# Altium PCB Chocolate_Vending_Machine_V2.1.PcbDoc
Units mm, origin at the board's own origin, x right, y up, seen from the top; angles counter-clockwise.
Board outline 80 x 72 mm, 2 copper layers (Top Layer, Bottom Layer); 26 components, 25 nets, 135 pads, 23 vias.
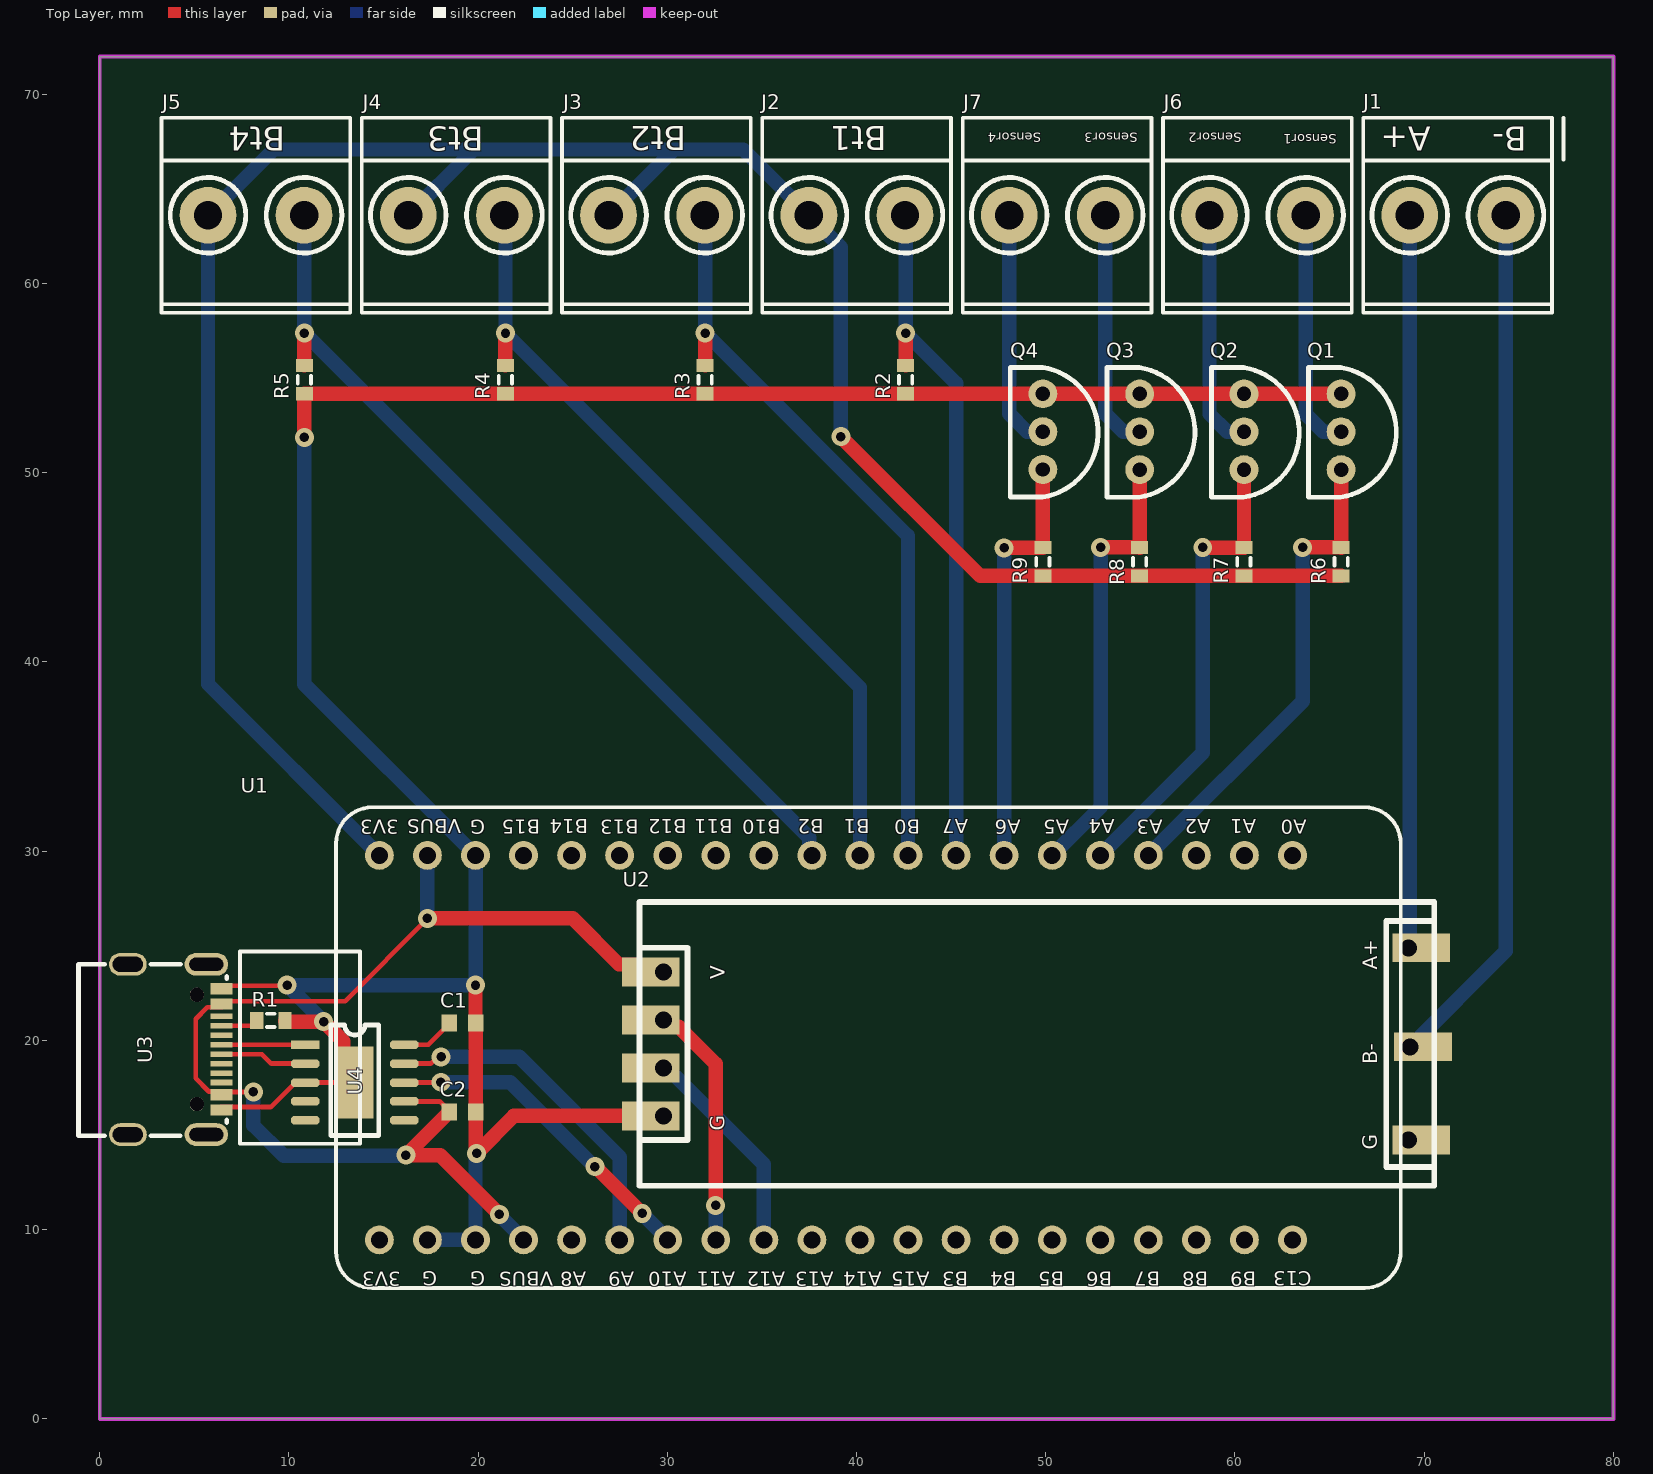
[diagram p0: Top Layer view]
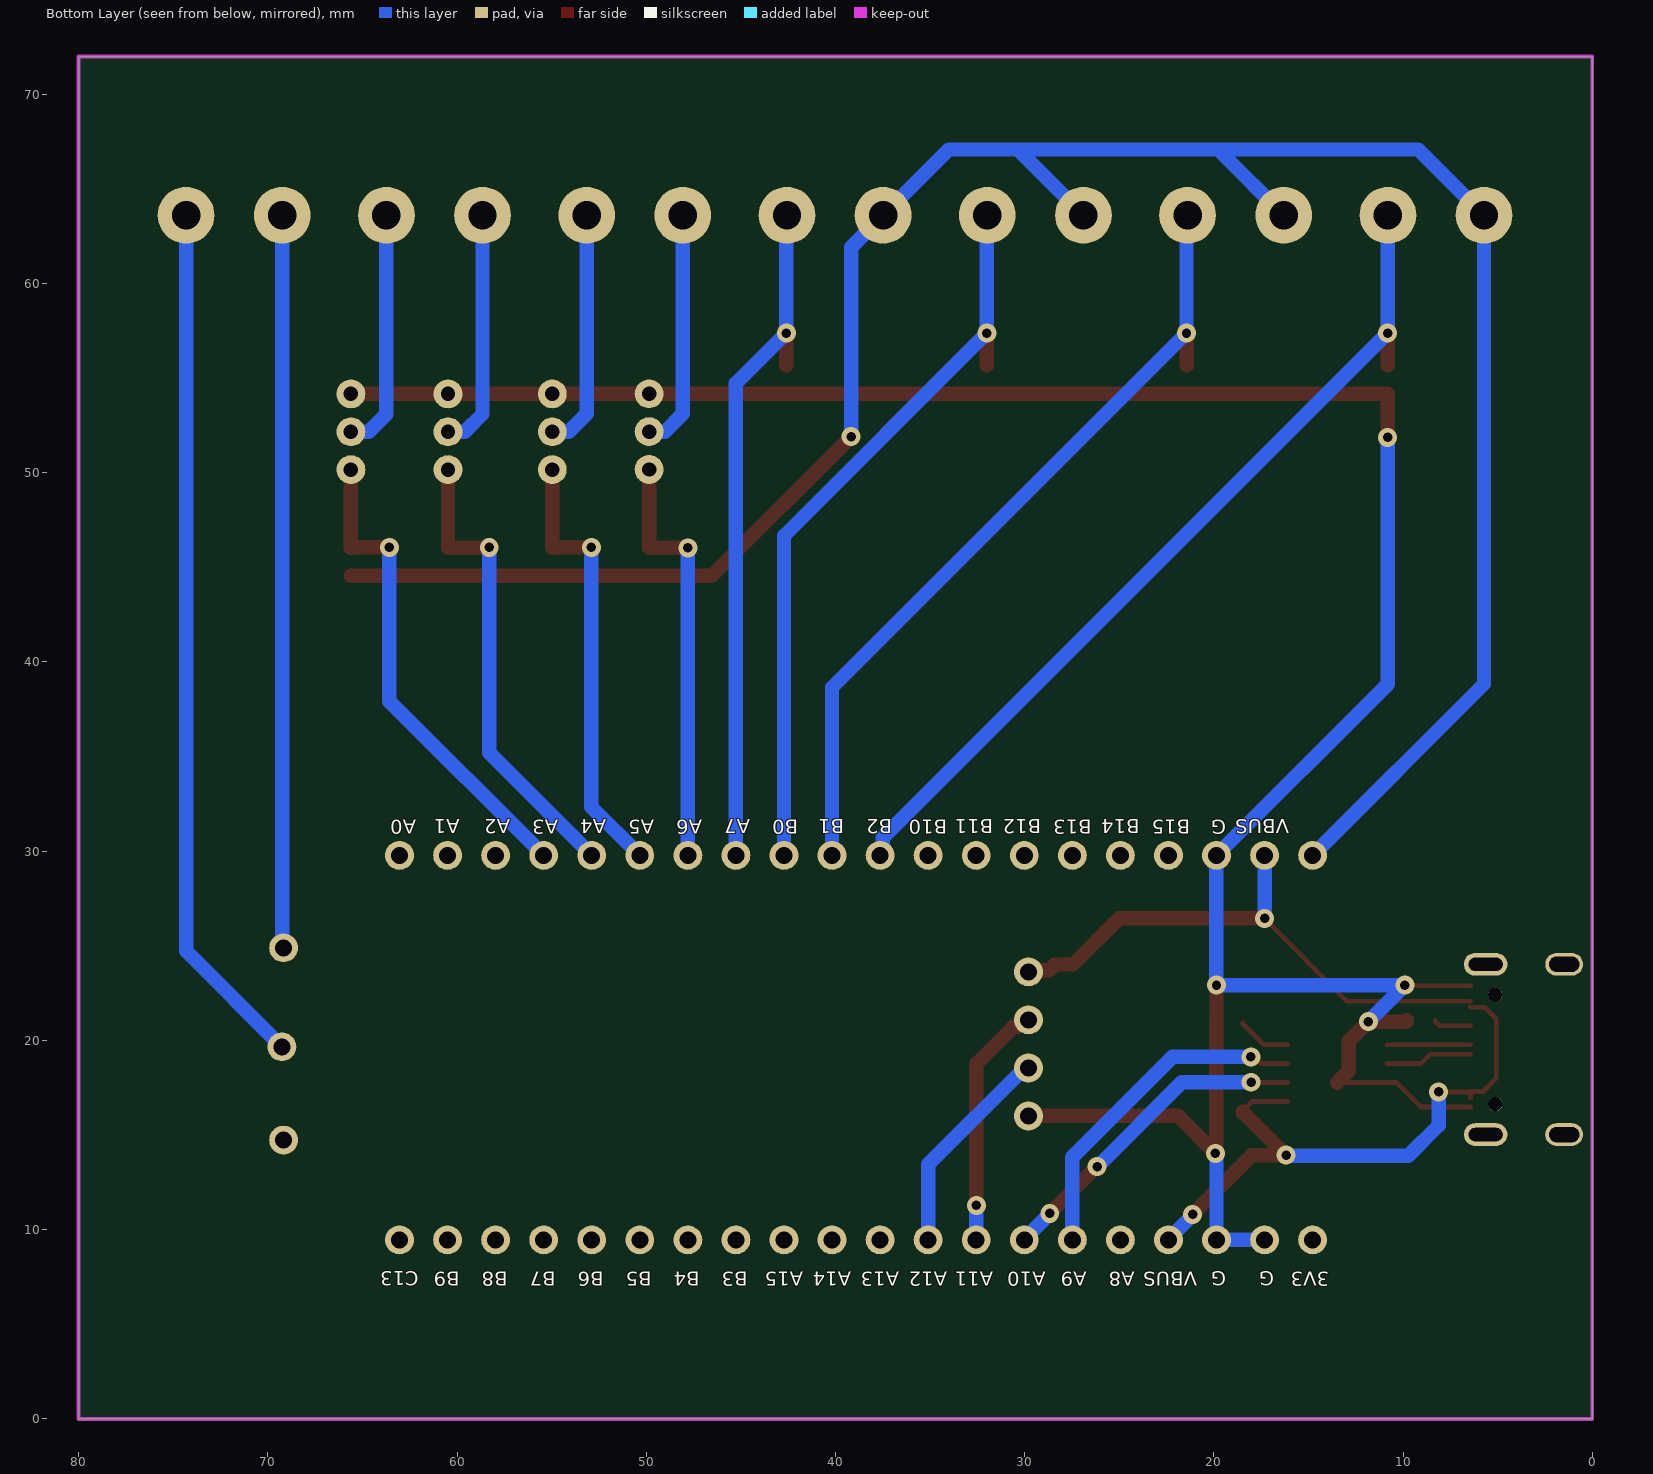
[diagram p1: Bottom Layer view, seen from below]

## Layer stack, top to bottom
Top Solder: solder mask 0.0102, Solder Resist, Dk 3.5
Top Layer: signal copper 0.0356
Dielectric 1: dielectric 0.32, FR-4, Dk 4.8
Bottom Layer: signal copper 0.0356
Bottom Solder: solder mask 0.0102, Solder Resist, Dk 3.5

## Board outline
0,-0.016 0,71.984 80,71.984 80,-0.016

## Design rules (kind name [scope] priority, off if disabled: settings)
Clearance [All] p1: gap=0.102 ignorepadtopadclearanceinfootprint=FALSE except(0: Arc-Hole Track-Hole SMDPad-Hole THPad-Hole Via-Hole Fill-Hole Poly-Hole Region-Hole Text-Hole)
ComponentClearance [All] p1 off: gap=0.254 collisioncheckmode=3 verticalgap=0.254 showdistances=FALSE
PolygonConnect [All] p1: connectstyle=Relief reliefconductorwidth=0.254 reliefentries=4 polygonreliefangle="90 Angle" airgapwidth=0.254
RoutingVias [All] p1: holewidth=0.5 width=1 viastyle="Through Hole" minholewidth=0.5 minwidth=1 maxholewidth=0.5 maxwidth=1
SolderMaskExpansion [All] p1: expansion=0.102 istentingtop=FALSE
Width [All] p1: maxlimit=0.762 minlimit=0.178 preferedwidth=0.254 minimp=50.000000 maximp=50.000000 favimp=50.000000
29 further rules are at their usual default settings.

## Classes and differential pairs
component class Chocolate_Vending_Machine: C1 C2 J1 J2 J3 J4 J5 J6 J7 Q1 Q2 Q3 Q4 R1 R4 R6 R7 R8 R9 U1 U2 U3 U4

## Components (designator, comment, footprint, x,y, rotation, side; value= is the part's Value field where it differs from the comment)
C1 "Cap Semi" 1608[0603] 19.175,20.911 r0 top value=0.1uF
C2 "Cap Semi" 1608[0603] 19.175,16.212 r180 top value=0.1uF
J1 "Terminal_Block" "terminal block" 74.32,63.602 r90 top
J2 "Terminal_Block" "terminal block" 42.563,63.602 r90 top
J3 "Terminal_Block" "terminal block" 31.977,63.602 r90 top
J4 "Terminal_Block" "terminal block" 21.391,63.602 r90 top
J5 "Terminal_Block" "terminal block" 10.805,63.602 r90 top
J6 "Terminal_Block" "terminal block" 63.734,63.602 r90 top
J7 "Terminal_Block" "terminal block" 53.149,63.602 r90 top
Q1 "S9013" S9013 65.606,52.155 r180 top
Q2 "S9013" S9013 60.475,52.155 r180 top
Q3 "S9013" S9013 54.964,52.155 r180 top
Q4 "S9013" S9013 49.848,52.162 r180 top
R1 "Res3" J1-0603 9.05,21.05 r180 top value=5.1K
R2 "Res3" J1-0603 42.596,54.915 r270 top value=1K
R3 "Res3" J1-0603 32.004,54.915 r270 top value=1K
R4 "Res3" J1-0603 21.438,54.915 r270 top value=1K
R5 "Res3" J1-0603 10.82,54.915 r270 top value=1K
R6 "Res3" J1-0603 65.608,45.288 r90 top value=1K
R7 "Res3" J1-0603 60.477,45.288 r90 top value=1K
R8 "Res3" J1-0603 54.966,45.288 r90 top value=1K
R9 "Res3" J1-0603 49.85,45.288 r90 top value=1K
U1 "STM32F411_TYPEC" STM32F411_TypeC 66.853,32.309 r180 top
U2 "UART_TO_485" UART_TO_RS485 70.367,12.294 r90 top
U3 "Type_C" Type_C_V2 2.996,19.336 r270 top
U4 "CH340K" CH340K_V1 13.486,17.764 r0 top

## Footprints (in the part's own frame and the unit in brackets; to place one, negate y for a bottom-side part, rotate by r counter-clockwise, add the part's x,y. Pads: shape width x height; smd on the part's side, far side on the other; paste and mask are expansions set on the pad)
1608[0603] [mm] "Chip Capacitor, Body 1.6x0.8mm, IPC High Density"
  rect 0.8x0.9 smd: 1(-0.7,0) 2(0.7,0)
  body extent -0.87,-0.48 0.87,0.48, height 1.3
CH340K_V1 [mm] "自己畫的"
  rect 2x3.8 smd: 0(0,0)
  rect 1.5x0.45 smd: 1(-2.616,2)
  oct 1.5x0.45 smd: 2(-2.616,1) 3(-2.616,0) 4(-2.616,-1) 5(-2.616,-2) 6(2.616,-2) 7(2.616,-1) 8(2.616,0) 9(2.616,1) 10(2.616,2)
  silkscreen extent -1.27,-2.79 1.27,3.05
J1-0603 [mm] "Chip Resistor, Body 1.6x0.8mm, IPC High Density"
  rect 0.7x0.9 smd: 1(-0.75,0) 2(0.75,0)
  silkscreen extent -0.2,-0.35 0.2,0.35, body extent -0.85,-0.48 0.85,0.48, height 0.9
S9013 [mil] "S9013_TO-92"
  round 60 hole 30: 0(-0.08,-78.87) 1(-0.08,-0.13) 2(-0.08,78.61)
  silkscreen extent -115,-134 68,136
STM32F411_TypeC [mil]
  round 60 hole 35.43: 1(2050,100) 2(1950,100) 3(1850,100) 4(1750,100) 5(1650,100) 6(1550,100) 7(1450,100) 8(1350,100) 9(1250,100) 10(1150,100) 11(1050,100) 12(950,100) 13(850,100) 14(750,100) 15(650,100) 16(550,100) 17(450,100) 18(350,100) 19(250,100) 20(150,100) 21(2050,900) 22(1950,900) 23(1850,900) 24(1750,900) 25(1650,900) 26(1550,900) 27(1450,900) 28(1350,900) 29(1250,900) 30(1150,900) 31(1050,900) 32(950,900) 33(850,900) 34(750,900) 35(650,900) 36(550,900) 37(450,900) 38(350,900) 39(250,900) 40(150,900)
  silkscreen extent -75,0 2340,1000, body extent -79,-4 2344,1004, height 50
"terminal block" [mm]
  round 3 hole 1.5 paste+0 mask+0.051: 1(0,5.08) 2(0,0)
  silkscreen extent -5.15,-2.44 5.15,7.54
Type_C_V2 [mm] "孟昌學長的"
  oval 1.2x2.3 hole 0.7 slot 1.8 at 90 deg: 0(-4.678,2.644) 0(4.322,2.644)
  oval 1.2x2 hole 0.8 slot 1.6 at 90 deg: 0(-4.678,-1.506) 0(4.322,-1.506)
  rect 0.3x1.15 smd: A1(-3.528,3.442) A4(-2.728,3.44) A5(-1.428,3.444) A6(-0.428,3.444) A7(0.072,3.442) A9(2.372,3.444) A12(3.172,3.444) B1(2.872,3.444) B4(2.072,3.444) B5(1.572,3.444) B6(0.572,3.444) B7(-0.928,3.442) B9(-2.428,3.44) B12(-3.228,3.442)
  rect 0.3x1.148 smd: A8(-1.928,3.444) B8(1.072,3.444)
  round 0.75 hole 0.75 unplated: ""(-3.068,2.144) ""(2.712,2.144)
  silkscreen extent -4.68,-4.11 4.38,3.72, body extent -4.67,-4.06 4.27,3.84, height 3.25
UART_TO_RS485 [mil]
  round 60 hole 35.43: 1(445.71,1597.13) 2(345.71,1597.13) 3(245.71,1597.13) 4(145.71,1597.13) 5(495.71,47.13) 6(289.8,43.58) 7(95.71,47.13)
  rect 60x120 smd: 1(445.71,1623.9) 2(345.71,1623.9) 3(245.71,1623.9) 4(145.71,1623.9) 5(495.71,20.35) 6(289.8,16.81) 7(95.71,20.35)
  silkscreen extent 0,-6 591,1647

## Part data
C1 C2: "Capacitor (Semiconductor SIM Model)", LatestRevisionDate=29-May-2009, LatestRevisionNote="IPC-7351 Footprint Added.", PackageDescription="Chip Capacitor", PackageReference=C1206, Published=8-Jun-2000, Publisher="Altium Limited"
J1 J2 J3 J4 J5 J6 J7: library part "Terminal Block"
R1 R2 R3 R4 R5 R6 R7 R8 R9: "Resistor", LatestRevisionDate=29-May-2009, LatestRevisionNote="IPC-7351 Footprint Added.", PackageDescription="Chip Resistor", PackageReference=J1-0603, Published=8-Jun-2000, Publisher="Altium Limited"

## Via types
v1: diameter 1, hole 0.5, Top Layer to Bottom Layer, 23 vias

## Nets (pads, with @x,y where several pads share a name; then routed paths per layer and width w, separated by ;. In a path a pad name is that pad's centre, name@x,y a point inside that pad or via, vN(x,y) a via of type N, cw(c..) or ccw(c..) an arc to the next point about the centre after c; other vN are vias at no path point)
3.3V: J2.1 J3.1 J4.1 J5.1 R6.1 R7.1 R8.1 R9.1 U1.1 | length 123.9
  Top Layer w0.762: v1(39.175,51.9) 46.537,44.538 R9.1 R8.1 R7.1 R6.1
  Bottom Layer w0.762: U1.1 5.725,38.827 J5.1 9.198,67.075 19.625,67.075 ; J4.1 19.625,66.916 19.625,67.075 ; J3.1 30.37,67.075 ; v1(39.175,51.9) 39.175,61.909 34.009,67.075 30.37,67.075 ; 19.625,67.075 30.37,67.075
5V: C2.2 U1.2 U1.24 U2.1 U3.A4 U3.A9 U3.B4 U3.B9 U4.7 | length 62.3
  Top Layer w0.254: U3.B9 6.412,21.741 5.698,21.741 5.08,21.123 5.08,17.987 5.78,17.287 6.416,17.287 U3.B4 ; U3.A4 12.971,22.064 v1@17.348,26.441 ; U3.A9 U3.B4 ; v1(8.128,17.272) 8.124,17.268 6.443,17.268 U3.B4 ; U4.7 17.973,16.764 18.475,16.262 C2.2
  Top Layer w0.762: v1(17.323,26.441) 17.348,26.441 25.009,26.441 27.447,24.003 28.403,24.003 28.71,23.696 29.448,23.696 29.464,23.68 U2.1@29.464,23.622 ; C2.2 18.475,16.162 18.456,16.143 18.406,16.143 v1(16.188,13.924) 18.001,13.924 v1(21.125,10.8)
  Bottom Layer w0.762: v1(8.128,17.272) 8.128,15.494 9.722,13.9 16.164,13.9 v1(16.188,13.924) ; v1(17.323,26.441) U1.2 ; v1(21.125,10.8) 21.125,10.763 22.403,9.485 U1.24
CH340K_Rx: U1.26 U4.9 | length 18.1
  Top Layer w0.254: U4.9 17.487,18.764 17.848,19.125 v1(18.05,19.125)
  Bottom Layer w0.762: v1(18.05,19.125) 22.175,19.125 27.483,13.817 U1.26
CH340K_Tx: U1.27 U4.8 | length 17.4
  Top Layer w0.254: U4.8 16.11,17.772 18.026,17.772 v1(18.034,17.78)
  Top Layer w0.762: v1(26.175,13.325) 26.188,13.325 28.663,10.85 v1(28.675,10.85)
  Bottom Layer w0.762: v1(18.034,17.78) 21.692,17.78 26.147,13.325 v1(26.175,13.325) ; v1(28.675,10.85) 28.675,10.823 30.023,9.476 U1.27
GND: C1.2 C2.1 Q1.0 Q2.0 Q3.0 Q4.0 R1.1 R2.2 R3.2 R4.2 R5.2 U1.3 U1.22 U1.23 U2.4 U3.A1 U3.A12 U3.B1 U3.B12 U4.0 U4.3 | length 145.9
  Top Layer w0.254: U3.A1 6.449,22.875 9.87,22.875 v1(9.906,22.911) ; U3.B1 9.045,16.464 10.345,17.764 U4.3 U4.0
  Top Layer w0.762: R1.1 9.8,21.012 9.831,20.981 v1(11.836,20.981) 12.867,19.95 12.867,18.383 U4.0 ; v1(10.82,51.866) R5.2 R4.2 R3.2 R2.2 Q4.0 49.853,54.161 54.962,54.161 Q3.0 Q2.0 Q1.0 ; v1@19.85,22.85 19.863,22.837 19.863,20.923 C1.2 C2.1 19.869,16.205 19.869,14.145 19.925,14.089 v1(19.925,14.025) 19.925,14.032 21.895,16.002 U2.4@29.464,16.002
  Bottom Layer w0.762: v1(10.82,51.866) 10.82,38.812 U1.3 ; v1(11.836,20.981) v1(9.906,22.911) v1(19.863,22.911) ; U1.22 U1.23 19.863,13.898 19.925,13.961 v1(19.925,14.025) ; v1@19.869,22.917 U1.3@19.869,29.762
Infrared_Input1: Q1.2 R6.2 U1.17 | length 25.8
  Top Layer w0.762: v1(63.575,46.05) 63.581,46.044 65.602,46.044 R6.2 Q1.2
  Bottom Layer w0.762: U1.17 63.575,37.921 v1(63.575,46.05)
Infrared_Input2: Q2.2 R7.2 U1.16 | length 24.8
  Top Layer w0.762: v1(58.3,46.05) 58.312,46.038 R7.2 Q2.2
  Bottom Layer w0.762: U1.16 58.3,35.186 v1(58.3,46.05)
Infrared_Input3: Q3.2 R8.2 U1.15 | length 23.5
  Top Layer w0.762: v1(52.9,46.05) 52.906,46.044 54.96,46.044 R8.2 Q3.2
  Bottom Layer w0.762: U1.15 52.9,32.326 v1(52.9,46.05)
Infrared_Input4: Q4.2 R9.2 U1.14 | length 22.4
  Top Layer w0.762: v1(47.8,46.025) 47.807,46.032 49.843,46.032 R9.2 Q4.2
  Bottom Layer w0.762: v1(47.8,46.025) v1(47.8,46.025) 47.801,29.77 U1.14
Infrared_Sensor1: J6.2 Q1.1 | length 12.8
  Bottom Layer w0.762: J6.2 63.734,53.091 64.667,52.158 Q1.1
Infrared_Sensor2: J6.1 Q2.1 | length 12.7
  Bottom Layer w0.762: J6.1 58.654,53.096 59.592,52.158 Q2.1
Infrared_Sensor3: J7.2 Q3.1 | length 12.7
  Bottom Layer w0.762: J7.2 53.149,53.101 54.092,52.158 Q3.1
Infrared_Sensor4: J7.1 Q4.1 | length 12.7
  Bottom Layer w0.762: J7.1 48.069,53.106 49.01,52.165 Q4.1
NetC1_1: C1.1 U4.10 | length 2.9
  Top Layer w0.254: U4.10 17.379,19.764 18.475,20.861 C1.1
NetR1_2: R1.2 U3.A5 | length 2
  Top Layer w0.254: U3.A5 8.077,20.764 8.3,20.987 R1.2
PlayBt1_Input: J2.2 R2.1 U1.13 | length 36.6
  Top Layer w0.762: R2.1 42.598,55.667 42.598,57.373 v1(42.6,57.375)
  Bottom Layer w0.762: J2.2@42.6,63.564 v1(42.6,57.375) 45.263,54.712 U1.13
PlayBt2_Input: J3.2 R3.1 U1.12 | length 40
  Top Layer w0.762: v1(32,57.375) 32.002,57.373 32.002,55.667 R3.1
  Bottom Layer w0.762: J3.2@32,63.578 v1(32,57.375) 42.723,46.652 U1.12
PlayBt3_Input: J4.2 R4.1 U1.11 | length 43.3
  Top Layer w0.762: R4.1 21.444,55.671 21.444,57.369 v1(21.45,57.375)
  Bottom Layer w0.762: J4.2 21.45,63.542 v1(21.45,57.375) 40.183,38.642 U1.11
PlayBt4_Input: J5.2 R5.1 U1.10 | length 46.6
  Top Layer w0.762: R5.1 10.823,55.667 10.823,57.373 v1(10.825,57.375)
  Bottom Layer w0.762: J5.2 10.815,63.592 10.815,57.385 v1(10.825,57.375) ; v1@10.871,57.329 37.497,30.703 37.497,29.915 U1.10
RS485_A+: J1.1 U2.5 | length 38.7
  Bottom Layer w0.762: U2.5@69.17,24.885 69.24,24.955 J1.1
RS485_B-: J1.2 U2.6 | length 46
  Bottom Layer w0.762: U2.6@69.26,19.655 74.32,24.715 J1.2
RS485_Rx: U1.29 U2.3 | length 11.4
  Bottom Layer w0.762: U2.3@29.8,18.535 30.006,18.535 35.103,13.438 U1.29
RS485_Tx: U1.28 U2.2 | length 13.2
  Top Layer w0.762: U2.2@29.464,21.082 U2.2@29.67,21.082 ; U2.2@29.8,21.075 30.006,21.075 30.379,20.702 30.598,20.702 32.55,18.75 v1(32.55,11.275)
  Bottom Layer w0.762: v1(32.55,11.275) 32.556,11.269 32.556,9.455 U1.28
UD+: U3.A6 U4.1 | length 4.4
  Top Layer w0.254: U3.A6 U4.1
UD-: U3.A7 U4.2 | length 4.6
  Top Layer w0.254: U3.A7 8.574,19.264 9.074,18.764 U4.2
pads on no net: U1.4 U1.5 U1.6 U1.7 U1.8 U1.9 U1.18 U1.19 U1.20 U1.21 U1.25 U1.30 U1.31 U1.32 U1.33 U1.34 U1.35 U1.36 U1.37 U1.38 U1.39 U1.40 U2.7 U3. U3.0 U3.A8 U3.B5 U3.B6 U3.B7 U3.B8 U4.4 U4.5 U4.6

## Keep-outs
Keep-Out Layer:
  the board outline again, w0.2

## Silkscreen, mask and mechanical layers (free items; w line width, h text height)
Top Overlay:
  lines w0.2: 77.359,66.548 77.359,68.752
  text "Bt2" at 30.997,68.297 h1.27 r180
  text "Bt1" at 41.597,68.297 h1.27 r180
  text "Bt4" at 9.797,68.285 h1.27 r180
  text "Bt3" at 20.297,68.285 h1.27 r180
  text "A+" at 70.349,68.285 h1.27 r180
  text "B-" at 75.429,68.285 h1.27 r180
  text "Sensor4" at 49.773,67.973 h0.51 r180
  text "Sensor3" at 54.873,67.973 h0.51 r180
  text "Sensor2" at 60.373,67.973 h0.51 r180
  text "Sensor1" at 65.373,67.873 h0.51 r180
Mechanical 1:
  lines w0.2: -4,3 82,3 ; -3,69 83,69 ; 3,-3 3,75 ; 77,-3 77,75
  lines w0.254: 0,73.254 0,73.762 ; 1.524,73 0,73.508 ; 1.524,74.016 0,73.508 ; 32.997,73.508 0,73.508 ; 47.013,73.508 80.01,73.508 ; 78.486,73 80.01,73.508 ; 78.486,74.016 80.01,73.508 ; 80.01,73.254 80.01,73.762 ; 82.395,1.537 82.903,0.013 ; 82.423,70.46 82.932,71.984 ; 82.649,0.013 83.157,0.013 ; 82.678,71.984 83.186,71.984 ; 82.913,25.943 82.903,0.013 ; 82.921,46.054 82.932,71.984 ; 83.411,1.537 82.903,0.013 ; 83.439,70.46 82.932,71.984
  text "3150 (mil)" at 33.251,72.593 h1.52
  text "2833.503 (mil)" at 83.827,26.197 h1.52 r89.98

## Text inside footprints (layer, text, board x,y; h text height)
U1: Top Overlay "B9" at 61.138,8.04 h1.3 r180; Top Overlay "C13" at 64.059,8.052 h1.3 r180; Top Overlay "B8" at 58.598,8.04 h1.3 r180; Top Overlay "B7" at 56.058,8.037 h1.3 r180; Top Overlay "B3" at 45.898,8.04 h1.3 r180; Top Overlay "B4" at 48.438,8.037 h1.3 r180; Top Overlay "B5" at 50.978,8.037 h1.3 r180; Top Overlay "B6" at 53.518,8.04 h1.3 r180; Top Overlay "A12" at 36.246,8.04 h1.3 r180; Top Overlay "A13" at 38.786,8.04 h1.3 r180; Top Overlay "A14" at 41.326,8.04 h1.3 r180; Top Overlay "A15" at 43.866,8.04 h1.3 r180; Top Overlay "A8" at 25.705,8.04 h1.3 r180; Top Overlay "A9" at 28.245,8.04 h1.3 r180; Top Overlay "A10" at 31.039,8.04 h1.3 r180; Top Overlay "A11" at 33.579,8.04 h1.3 r180; Top Overlay "3V3" at 15.926,8.04 h1.3 r180; Top Overlay "G" at 17.831,8.052 h1.3 r180; Top Overlay "G" at 20.371,8.052 h1.3 r180; Top Overlay "VBUS" at 23.968,8.037 h1.3 r180; Top Overlay "B15" at 23.292,31.929 h1.3 r180; Top Overlay "G" at 20.371,31.929 h1.3 r180; Top Overlay "VBUS" at 19.101,31.943 h1.3 r180; Top Overlay "3V3" at 15.799,31.928 h1.3 r180; Top Overlay "B11" at 33.452,31.943 h1.3 r180; Top Overlay "B12" at 31.039,31.943 h1.3 r180; Top Overlay "B13" at 28.499,31.928 h1.3 r180; Top Overlay "B14" at 25.832,31.943 h1.3 r180; Top Overlay "B0" at 43.358,31.929 h1.3 r180; Top Overlay "B1" at 40.691,31.943 h1.3 r180; Top Overlay "B2" at 38.278,31.943 h1.3 r180; Top Overlay "B10" at 35.992,31.929 h1.3 r180; Top Overlay "A4" at 53.645,31.943 h1.3 r180; Top Overlay "A5" at 51.232,31.929 h1.3 r180; Top Overlay "A6" at 48.692,31.929 h1.3 r180; Top Overlay "A7" at 45.898,31.943 h1.3 r180; Top Overlay "A3" at 56.185,31.928 h1.3 r180; Top Overlay "A2" at 58.725,31.943 h1.3 r180; Top Overlay "A1" at 61.138,31.943 h1.3 r180; Top Overlay "A0" at 63.805,31.929 h1.3 r180; Bottom Overlay "B14" at 23.927,31.943 h1.3 r180; Bottom Overlay "B10" at 34.087,31.929 h1.3 r180; Bottom Overlay "B13" at 26.467,31.928 h1.3 r180; Bottom Overlay "A2" at 57.201,31.943 h1.3 r180; Bottom Overlay "A5" at 49.581,31.929 h1.3 r180; Bottom Overlay "VBUS" at 16.012,31.943 h1.3 r180; Bottom Overlay "G" at 19.355,31.929 h1.3 r180; Bottom Overlay "B15" at 21.26,31.929 h1.3 r180; Bottom Overlay "B12" at 29.134,31.943 h1.3 r180; Bottom Overlay "B11" at 31.674,31.943 h1.3 r180; Bottom Overlay "B2" at 37.008,31.943 h1.3 r180; Bottom Overlay "B1" at 39.548,31.943 h1.3 r180; Bottom Overlay "A7" at 44.501,31.943 h1.3 r180; Bottom Overlay "A6" at 47.041,31.929 h1.3 r180; Bottom Overlay "A3" at 54.661,31.928 h1.3 r180; Bottom Overlay "A1" at 59.868,31.943 h1.3 r180; Bottom Overlay "B0" at 41.961,31.929 h1.3 r180; Bottom Overlay "A4" at 52.121,31.943 h1.3 r180; Bottom Overlay "A0" at 62.154,31.929 h1.3 r180; Bottom Overlay "B9" at 59.868,8.04 h1.3 r180; Bottom Overlay "B5" at 49.708,8.037 h1.3 r180; Bottom Overlay "A14" at 39.167,8.04 h1.3 r180; Bottom Overlay "C13" at 62.027,8.052 h1.3 r180; Bottom Overlay "B8" at 57.328,8.04 h1.3 r180; Bottom Overlay "B7" at 54.788,8.037 h1.3 r180; Bottom Overlay "B3" at 44.628,8.04 h1.3 r180; Bottom Overlay "B4" at 47.168,8.037 h1.3 r180; Bottom Overlay "A13" at 36.627,8.04 h1.3 r180; Bottom Overlay "A15" at 41.707,8.04 h1.3 r180; Bottom Overlay "A12" at 34.087,8.04 h1.3 r180; Bottom Overlay "A10" at 28.88,8.04 h1.3 r180; Bottom Overlay "A11" at 31.674,8.04 h1.3 r180; Bottom Overlay "A8" at 24.181,8.04 h1.3 r180; Bottom Overlay "VBUS" at 20.879,8.037 h1.3 r180; Bottom Overlay "3V3" at 13.894,8.04 h1.3 r180; Bottom Overlay "G" at 16.815,8.052 h1.3 r180; Bottom Overlay "B6" at 52.248,8.04 h1.3 r180; Bottom Overlay "A9" at 26.721,8.04 h1.3 r180; Bottom Overlay "G" at 19.355,8.052 h1.3 r180
U2: Top Overlay "G" at 33.03,15.225 h0.76 r90; Top Overlay "V" at 33.03,23.225 h0.76 r90; Top Overlay "G" at 67.53,14.225 h0.76 r90; Top Overlay "B-" at 67.53,18.725 h0.76 r90; Top Overlay "A+" at 67.53,23.725 h0.76 r90